# Altium PCB mainboard.PCBDOC
Units mm, origin at the board's own origin, x right, y up, seen from the top; angles counter-clockwise.
Board outline 47.63 x 51.69 mm, 2 copper layers (Top Layer, Bottom Layer), stack 1.66 mm thick; 9 components, 8 nets, 33 pads, 0 vias.
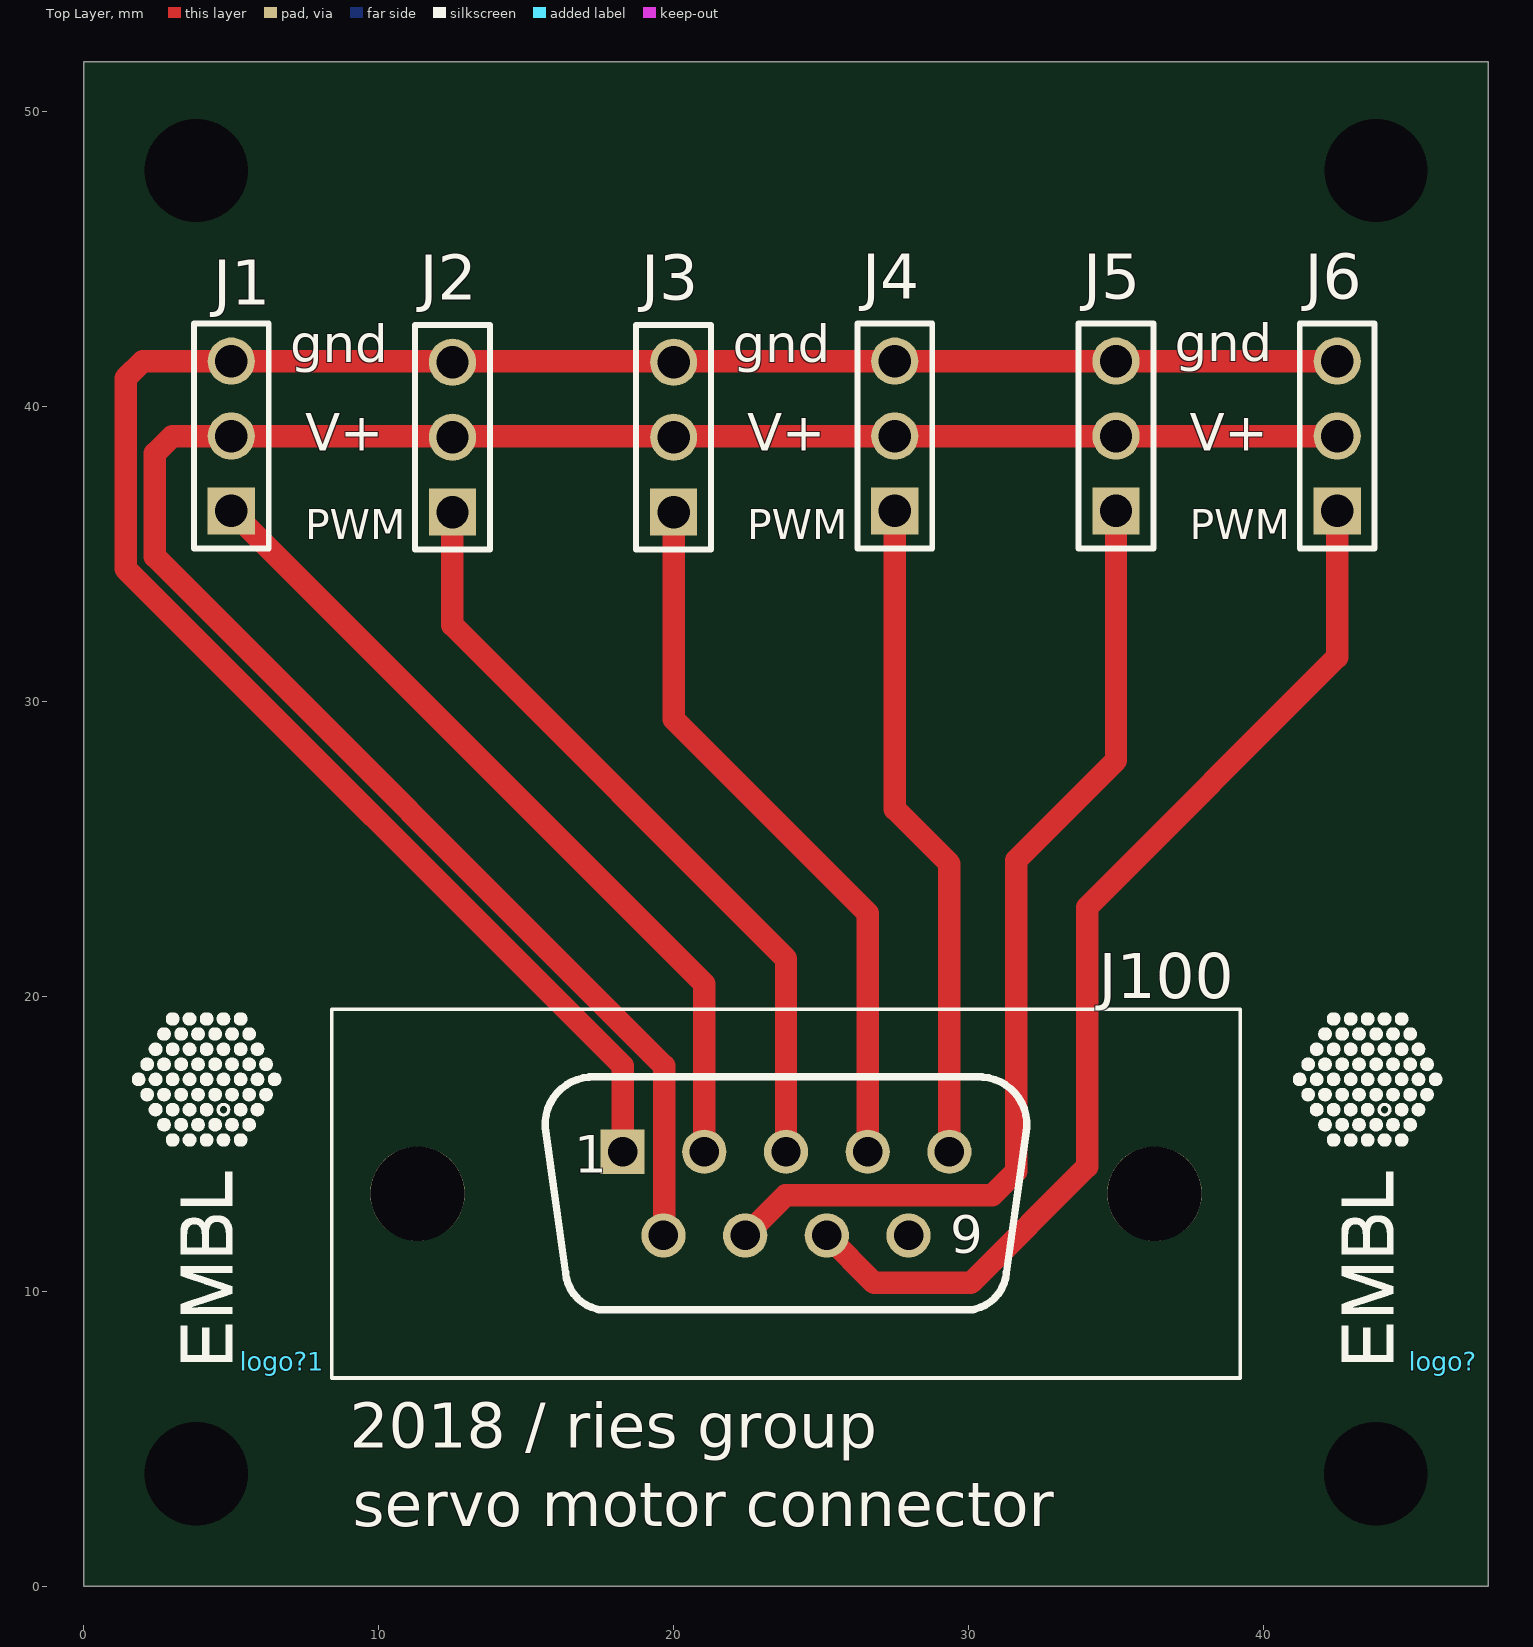
[diagram p0: Top Layer view]
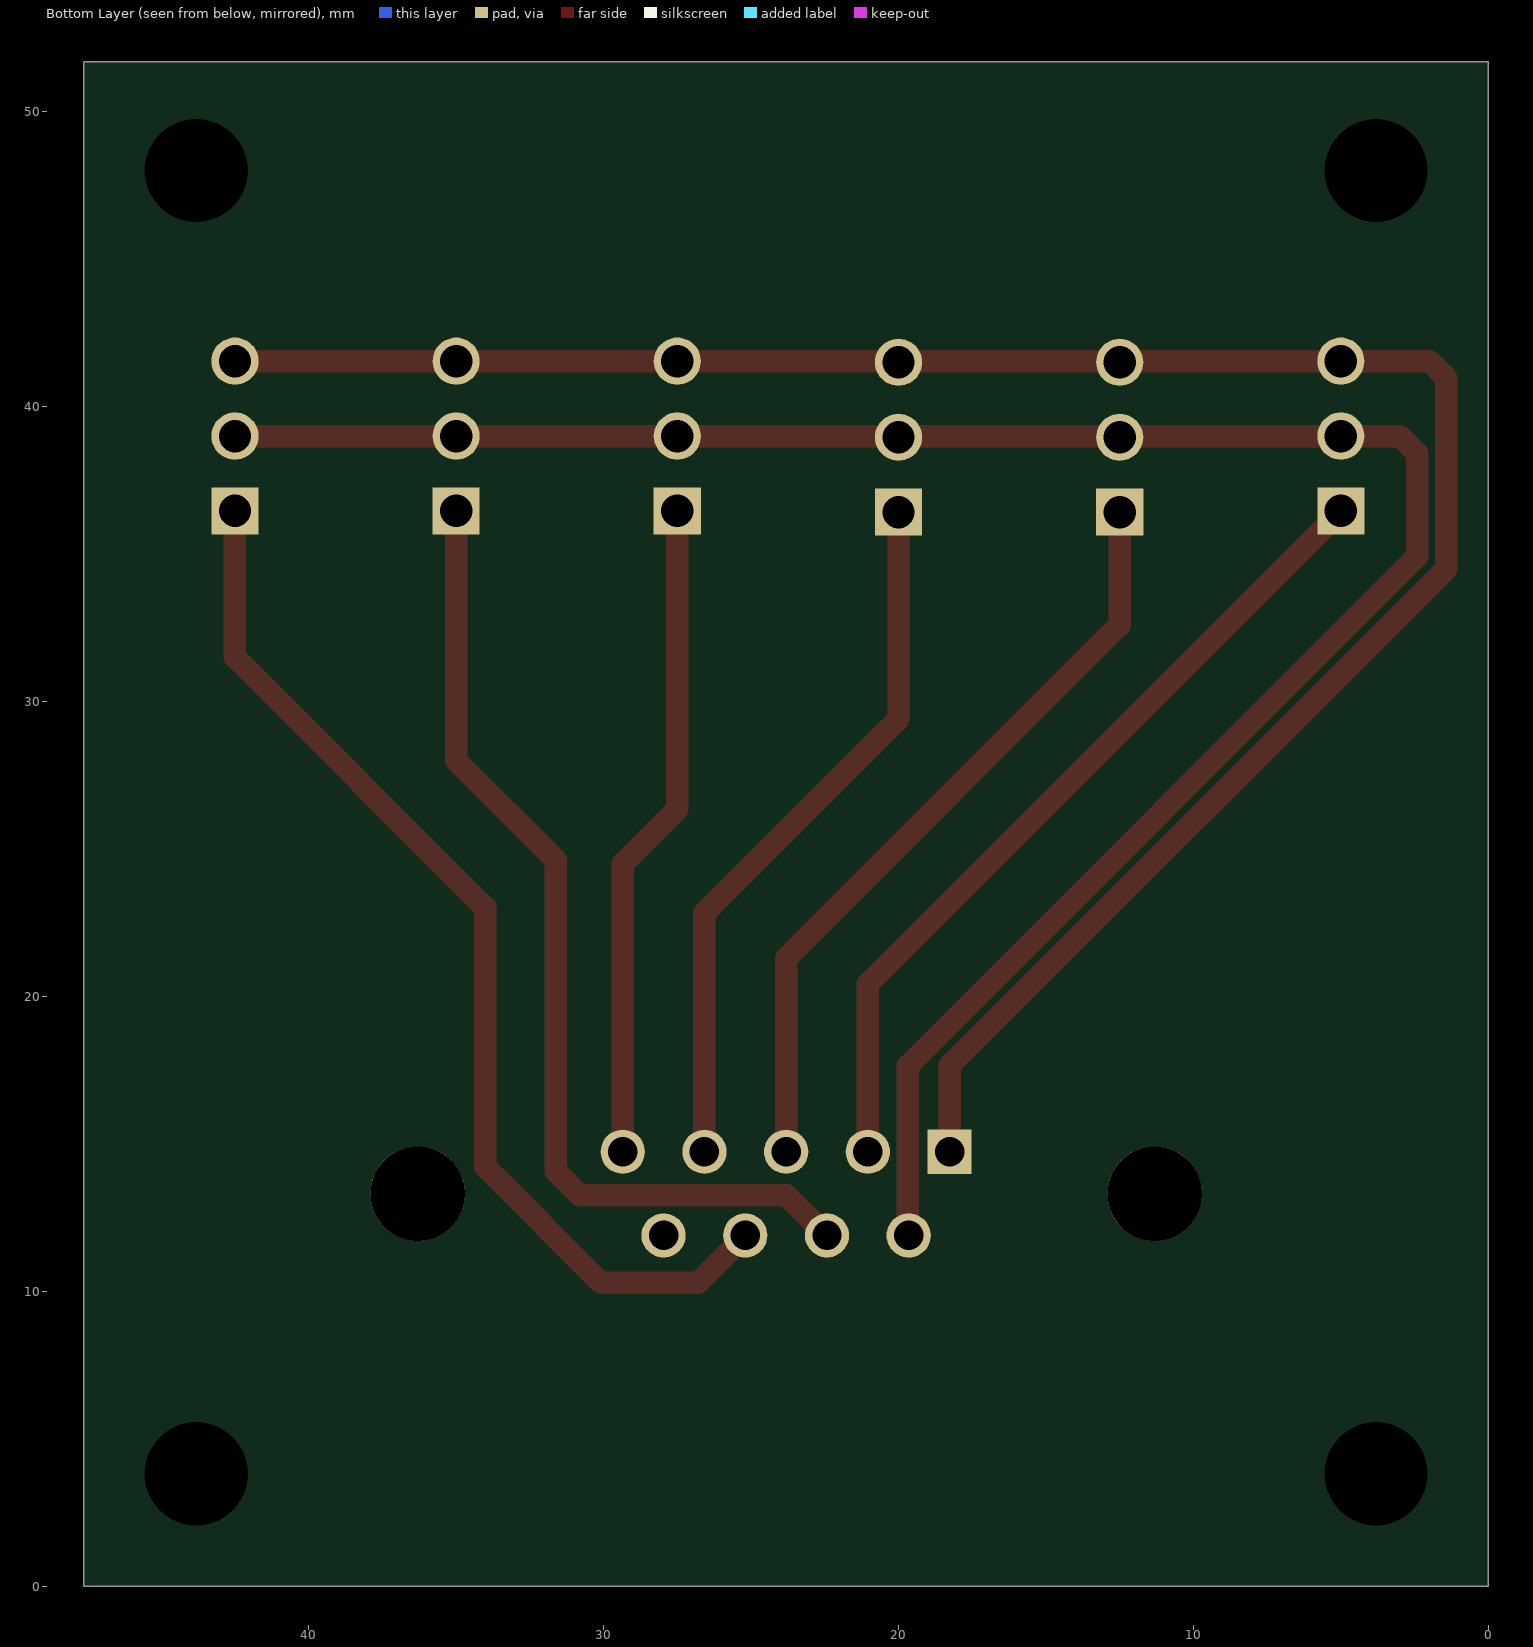
[diagram p1: Bottom Layer view, seen from below]
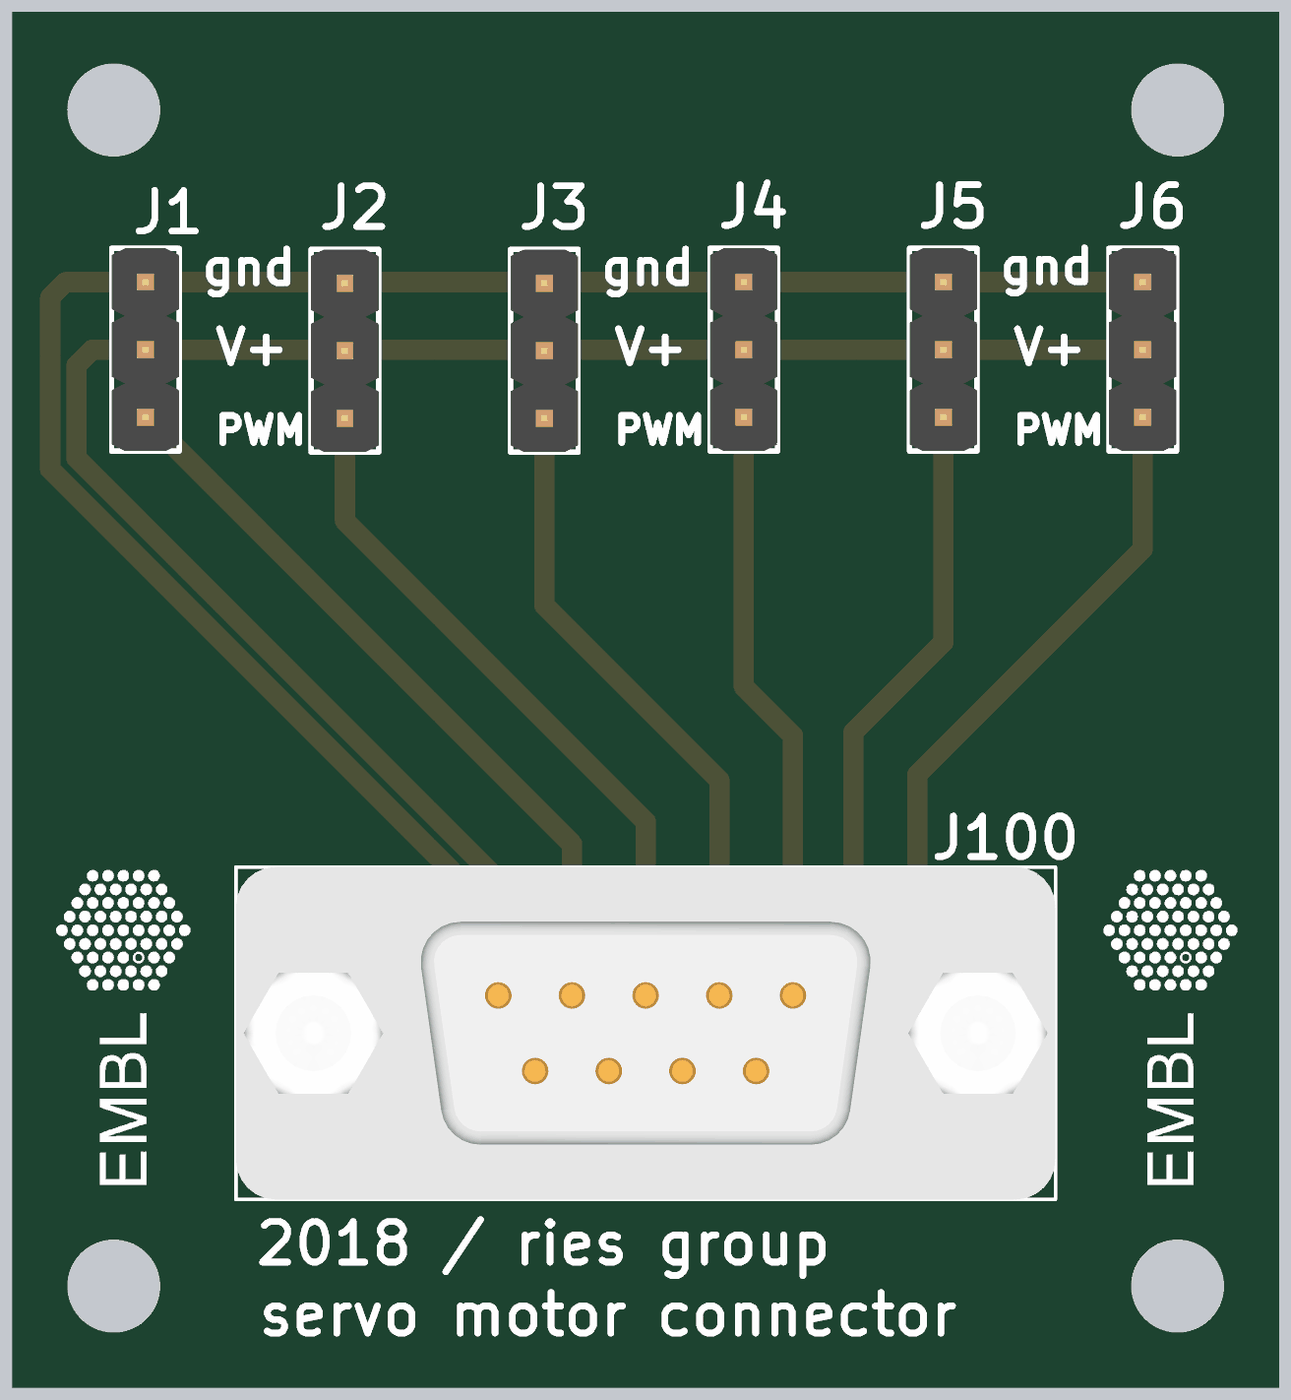
[diagram p2: 3D render of the assembled board from above, using the file's embedded part models]

## Layer stack, top to bottom
Top Solder: solder mask 0.0102, Solder Resist, Dk 3.5
Top Layer: signal copper 0.055
Dielectric1: dielectric 1.55, FR-4, Dk 4.8
Bottom Layer: signal copper 0.055
Bottom Solder: solder mask 0.0102, Solder Resist, Dk 3.5

## Board outline
0,0 0,51.689 47.625,51.689 47.625,0

## Design rules (kind name [scope] priority, off if disabled: settings)
Clearance ClearanceRoom [WithinRoom('room1') or  WithinRoom('room2')  or  WithinRoom('room3') or  WithinRoom('room4')   or  WithinRoom('room5')] p1: gap=0.178 ignorepadtopadclearanceinfootprint=FALSE except(0: Arc-Hole Track-Hole SMDPad-Hole THPad-Hole Via-Hole Fill-Hole Poly-Hole Region-Hole Text-Hole)
Clearance "Clearance_24V class" [InNetClass('24V_net') or InNetClass('15V net') or InNetClass('5V net')] p2: gap=0.381 ignorepadtopadclearanceinfootprint=FALSE except(0: Arc-Hole Track-Hole SMDPad-Hole THPad-Hole Via-Hole Fill-Hole Poly-Hole Region-Hole Text-Hole)
Clearance Clearance_1 [All] p3: gap=0.229 ignorepadtopadclearanceinfootprint=FALSE except(0: Arc-Hole Track-Hole SMDPad-Hole THPad-Hole Via-Hole Fill-Hole Poly-Hole Region-Hole Text-Hole)
FabricationTestPointUsage TestPointUsage [All] p1: valid=0 allowmultiple=FALSE
FabricationTestpoint Testpoint [All] p1: side=3 testpointundercomponent=TRUE minsize=1.016 maxsize=2.54 preferedsize=1.524 minholesize=0 maxholesize=1.016 preferedholesize=0.813 testpointgrid=0.025 allowsidetop=TRUE allowsidebottom=TRUE usegrid=TRUE gridtolerance=0
HoleSize [All] p1: absolutevalues=TRUE maxlimit=6 minlimit=0.025 maxpercent=80.000 minpercent=20.000
PolygonConnect PolygonConnect_Power [(InNet('+5V') OR InNet('-24VBUS'))] p1: connectstyle=Relief reliefconductorwidth=2.54 reliefentries=4 polygonreliefangle="90 Angle" airgapwidth=0.254
PolygonConnect [All] p2: connectstyle=Relief reliefconductorwidth=0.254 reliefentries=4 polygonreliefangle="90 Angle" airgapwidth=0.254
RoutingVias [All] p1: holewidth=0.5 width=1 viastyle="Through Hole" minholewidth=0.3 minwidth=0.5 maxholewidth=0.711 maxwidth=1.27
SilkToSolderMaskClearance SilkscreenOverComponentPads [IsPad] p1: minsilkscreentomaskgap=0.254 clearancetoexposedcopper=TRUE
SolderMaskExpansion [All] p1: expansion=0.102
Width WidthRoomGeneral [WithinRoom('room2')  or  WithinRoom('room3') or  WithinRoom('room4') or  WithinRoom('room5')] p1: maxlimit=0.406 minlimit=0.406 preferedwidth=0.406
Width WidthRoom [WithinRoom('room1') or  WithinRoom('room2')  or  WithinRoom('room3') or  WithinRoom('room4')] p2: maxlimit=0.254 minlimit=0.254 preferedwidth=0.254
Width "Width_24V class" [InNetClass('24V_net')  or InNetClass('15V net') or InNetClass('5V net')] p3: maxlimit=0.762 minlimit=0.762 preferedwidth=0.762
Width Width_1 [All] p4: maxlimit=0.762 minlimit=0.762 preferedwidth=0.762
26 further rules are at their usual default settings.

## Classes and differential pairs
component class Sheet_Power: J1 J2 J3 J4 J5 J6 J100 logo?

## Components (designator, comment, footprint, x,y, rotation, side; value= is the part's Value field where it differs from the comment)
J1 "61300311121" 61300311121 5,36.46 r90 top
J2 "61300311121" 61300311121 12.5,36.42 r90 top
J3 "61300311121" 61300311121 20,36.42 r90 top
J4 "61300311121" 61300311121 27.5,36.46 r90 top
J5 "61300311121" 61300311121 35,36.46 r90 top
J6 "61300311121" 61300311121 42.5,36.46 r90 top
J100 "61800929221" PCBComponent 18.27,14.732 r0 top
logo? "EMBL" EMBL 46.101,7.62 r90 top
logo?1 "EMBL" EMBL 6.731,7.62 r90 top (schematic designator logo?)

## Footprints (in the part's own frame and the unit in brackets; to place one, negate y for a bottom-side part, rotate by r counter-clockwise, add the part's x,y. Pads: shape width x height; smd on the part's side, far side on the other; paste and mask are expansions set on the pad)
61300311121 [mm] "3Pol; gerade; WR-PHD 2.54 mm THT Pin Header"
  rect 1.6x1.6 hole 1.1: 1(0,0)
  round 1.6 hole 1.1: 2(2.54,0) 3(5.08,0)
  silkscreen extent -1.27,-1.27 6.35,1.27, body extent -1.27,-1.27 6.35,1.27, height 8.57
EMBL [mm] "12 x 5mm"
  silkscreen extent -0.01,0.04 11.83,5.08
PCBComponent [mm]
  rect 1.5x1.5 hole 1: 1(0,0)
  round 1.5 hole 1: 2(2.77,0) 3(5.54,0) 4(8.31,0) 5(11.08,0) 6(1.385,-2.84) 7(4.155,-2.84) 8(6.925,-2.84) 9(9.695,-2.84)
  round 3.2 hole 3.2 unplated: ""(-6.955,-1.42) ""(18.035,-1.42)
  silkscreen extent -9.87,-7.67 20.94,4.83, body extent -9.86,-7.67 20.95,4.83, height 12.9

## Part data
J1 J2 J3 J4 J5 J6: library part CMP-001-0072-1, "3Pol; gerade; WR-PHD 2.54 mm THT Pin Header"
J100: library part CMP-001-0130-A.1, "61800929221 / 9pol"
logo? logo?1: library part "EMBL gebembel"

## Free pads (board coordinates)
  round 3.302 hole 3.505 unplated: 0(3.81,3.81) 0(3.81,48.006) 0(43.81,3.81) 0(43.815,48.006)

## Nets (pads, with @x,y where several pads share a name; then routed paths per layer and width w, separated by ;. In a path a pad name is that pad's centre, name@x,y a point inside that pad or via, vN(x,y) a via of type N, cw(c..) or ccw(c..) an arc to the next point about the centre after c; other vN are vias at no path point)
+V: J1.2 J2.2 J3.2 J4.2 J5.2 J6.2 J100.6 | length 74
  Top Layer w0.762: J100.6 19.681,11.892 19.681,17.641 2.411,34.911 2.411,38.411 3,39 J1.2 J4.2 J5.2 J6.2
GND: J1.3 J2.3 J3.3 J4.3 J5.3 J6.3 J100.1 | length 74.5
  Top Layer w0.762: J100.1 18.27,17.651 1.42,34.5 1.42,40.96 2,41.54 J1.3 20,41.54 J4.3 J5.3 J6.3
NetJ1_1: J1.1 J100.2 | length 28.4
  Top Layer w0.762: J1.1 21.04,20.42 J100.2
NetJ2_1: J2.1 J100.3 | length 26.4
  Top Layer w0.762: J2.1 12.5,32.585 23.81,21.275 J100.3
NetJ3_1: J3.1 J100.4 | length 24.4
  Top Layer w0.762: J3.1 20,29.403 26.58,22.823 J100.4
NetJ4_1: J4.1 J100.5 | length 22.5
  Top Layer w0.762: J4.1 27.5,26.348 29.35,24.498 J100.5
NetJ5_1: J5.1 J100.7 | length 33.9
  Top Layer w0.762: J100.7 22.433,11.892 23.793,13.252 30.8,13.252 31.623,14.074 31.623,24.623 35,28 J5.1
NetJ6_1: J6.1 J100.8 | length 36.9
  Top Layer w0.762: J100.8 26.8,10.287 30.081,10.287 34.018,14.224 34.018,23.018 42.5,31.5 J6.1
pads on no net: J100. J100.9

## Silkscreen, mask and mechanical layers (free items; w line width, h text height)
Top Overlay:
  text "gnd" at 37,41.54 h1.27
  text "gnd" at 7,41.5 h1.27
  text "gnd" at 22,41.5 h1.27
  text "V+" at 7.5,38.5 h1.27
  text "V+" at 22.5,38.5 h1.27
  text "V+" at 37.5,38.5 h1.27
  text "PWM" at 7.5,35.5 h1.02
  text "PWM" at 22.5,35.5 h1.02
  text "PWM" at 37.5,35.5 h1.02
  text "2018 / ries group" at 9.017,4.699 h1.52
  text "servo motor connector" at 9.126,2.032 h1.52
M1_BoardOutline:
  lines w0.064: -12.019,86.868 cw(c-11.956,86.868) -11.892,86.868 ; -11.956,86.804 cw(c-11.956,86.868) -11.956,86.931
  lines w0.127: 0,0 0,51.689 47.625,51.689 47.625,0 0,0
M12_titleBlock:
  lines w0.127: -66.35,2.426 -61.27,2.426 ; -66.35,50.686 -61.27,50.686 ; -66.35,98.946 -61.27,98.946 ; 6.675,-45.834 6.675,-40.754 ; 6.675,142.126 6.675,147.206 ; 79.7,-45.834 79.7,-40.754 ; 79.7,142.126 79.7,147.206 ; 106.37,-40.754 70.81,-40.754 70.81,-10.274 106.37,-10.274 ; 107.107,-33.134 220.67,-33.134 ; 107.107,-25.514 220.67,-25.514 ; 107.107,-17.894 144.47,-17.894 ; 144.47,-40.754 144.47,-25.514 144.47,-10.274 ; 152.725,-45.834 152.725,-40.754 ; 152.725,142.126 152.725,147.206 ; 197.81,-40.754 197.81,-25.514 ; 220.67,2.426 225.75,2.426 ; 220.67,50.686 225.75,50.686 ; 220.67,98.946 225.75,98.946 ; 144.47,-10.274 107.107,-10.274 107.107,-40.754 220.67,-40.754 ; 144.47,-10.274 220.67,-10.274 220.67,-40.754 ; 220.67,-40.754 -61.27,-40.754 -61.27,142.126 220.67,142.126 220.67,-40.754 ; -66.35,-45.834 225.75,-45.834 225.75,147.206 -66.35,147.206 -66.35,-45.834
  lines w0.254: 173.464,-9.652 173.464,140.208 ; 173.464,80.57 219.184,80.57 219.184,83.11 219.184,102.108 ; 173.464,102.108 219.184,102.108 ; 173.464,107.188 219.184,107.188 219.184,102.108
  text "1" at -30.104,143.777 h1.78
  text "2" at 42.54,143.777 h1.78
  text "3" at 115.692,143.777 h1.78
  text "4" at 188.59,143.777 h1.78
  text "A" at -64.445,120.764 h1.78
  text "A" at 222.575,120.764 h1.78
  text "Abstand von Frontpanelkante" at 176.004,114.808 h1.52
  text "links unten zum Nullpunkt:" at 176.004,112.268 h1.52
  text "13,9mm" at 176.004,109.728 h1.52
  text "Mechanical Layer Definitionen:" at 176.004,103.43 h1.52
  text "M1_boardOutline" at 176.004,99.568 h1.52
  text "M11_text_topL" at 176.004,95.81 h1.52
  text "M12_titleBlock" at 176.004,93.27 h1.52
  text "M13_3D_topL" at 176.004,90.73 h1.52
  text "M14_3D_botL" at 176.004,88.19 h1.52
  text "M15_courtyard_topL" at 176.004,85.934 h1.52
  text "M16_courtyard_botL" at 176.004,83.394 h1.52
  text "B" at -64.445,72.707 h1.78
  text "B" at 222.575,72.707 h1.78
  text "C" at -64.445,24.194 h1.78
  text "C" at 222.575,24.194 h1.78
  text "ENGINEER:" at 107.64,-12.814 h1.14
  text "TITLE:" at 145.74,-12.814 h1.14
  text "PCB DESIGNER:" at 107.64,-20.307 h1.14
  text "D" at -64.445,-23.812 h1.78
  text "D" at 222.575,-23.812 h1.78
  text "EMBL - European" at 65.832,-26.479 h1.78
  text "DATE:" at 107.64,-28.054 h1.14
  text "PART NO.:" at 145.74,-28.054 h1.14
  text "REV:" at 199.08,-28.054 h1.14
  text "Molecular Biology Laboratory" at 72.182,-29.019 h1.78
  text "Meyerhofstrasse 1" at 72.182,-30.924 h1.78
  text ".Print_Date" at 108.91,-31.102 h1.78
  text "69117 Heidelberg" at 72.182,-34.099 h1.78
  text "FILE NAME:" at 107.64,-35.674 h1.14
  text "DWG NO:" at 145.74,-35.674 h1.14
  text "SCALE:" at 199.08,-35.674 h1.14
  text "Germany" at 72.182,-36.957 h1.78
  text ".PCB_FILE_NAME_NO_PATH" at 108.91,-38.722 h1.78
  text "1" at -30.104,-44.183 h1.78
  text "2" at 42.54,-44.183 h1.78
  text "3" at 115.692,-44.183 h1.78
  text "4" at 188.59,-44.183 h1.78

## Text inside footprints (layer, text, board x,y; h text height)
J100: Top Overlay "1" at 16.635,14.012 h1.27; Top Overlay "9" at 29.385,11.287 h1.27